# Altium PCB PCB.PcbDoc
Units mil, origin at the board's own origin, x right, y up, seen from the top; angles counter-clockwise.
Board outline 2016.73 x 1850.39 mil, 2 copper layers (Top Layer, Bottom Layer); 43 components, 26 nets, 103 pads, 47 vias.
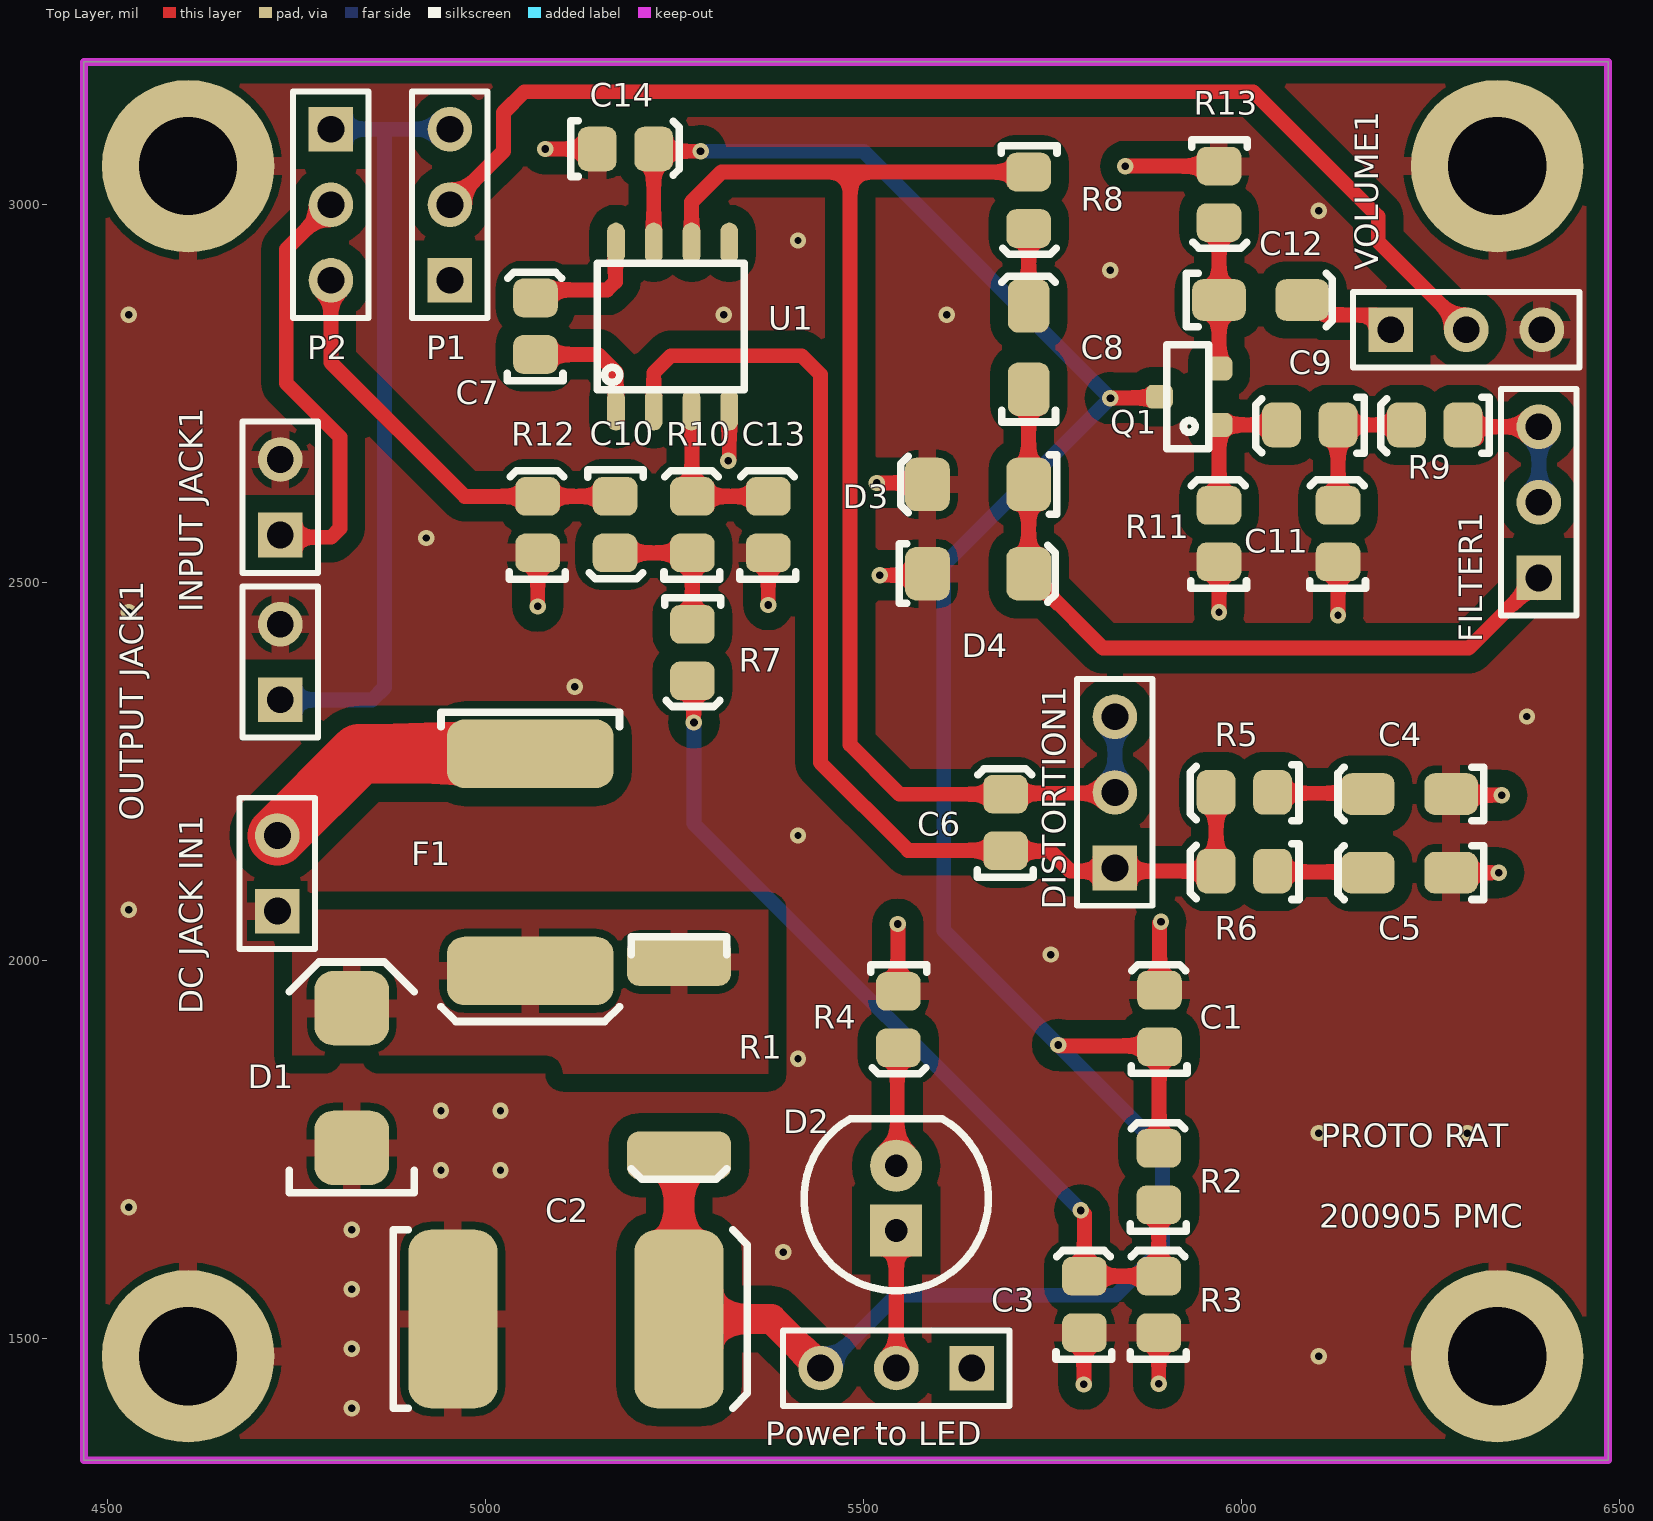
[diagram p0: Top Layer view]
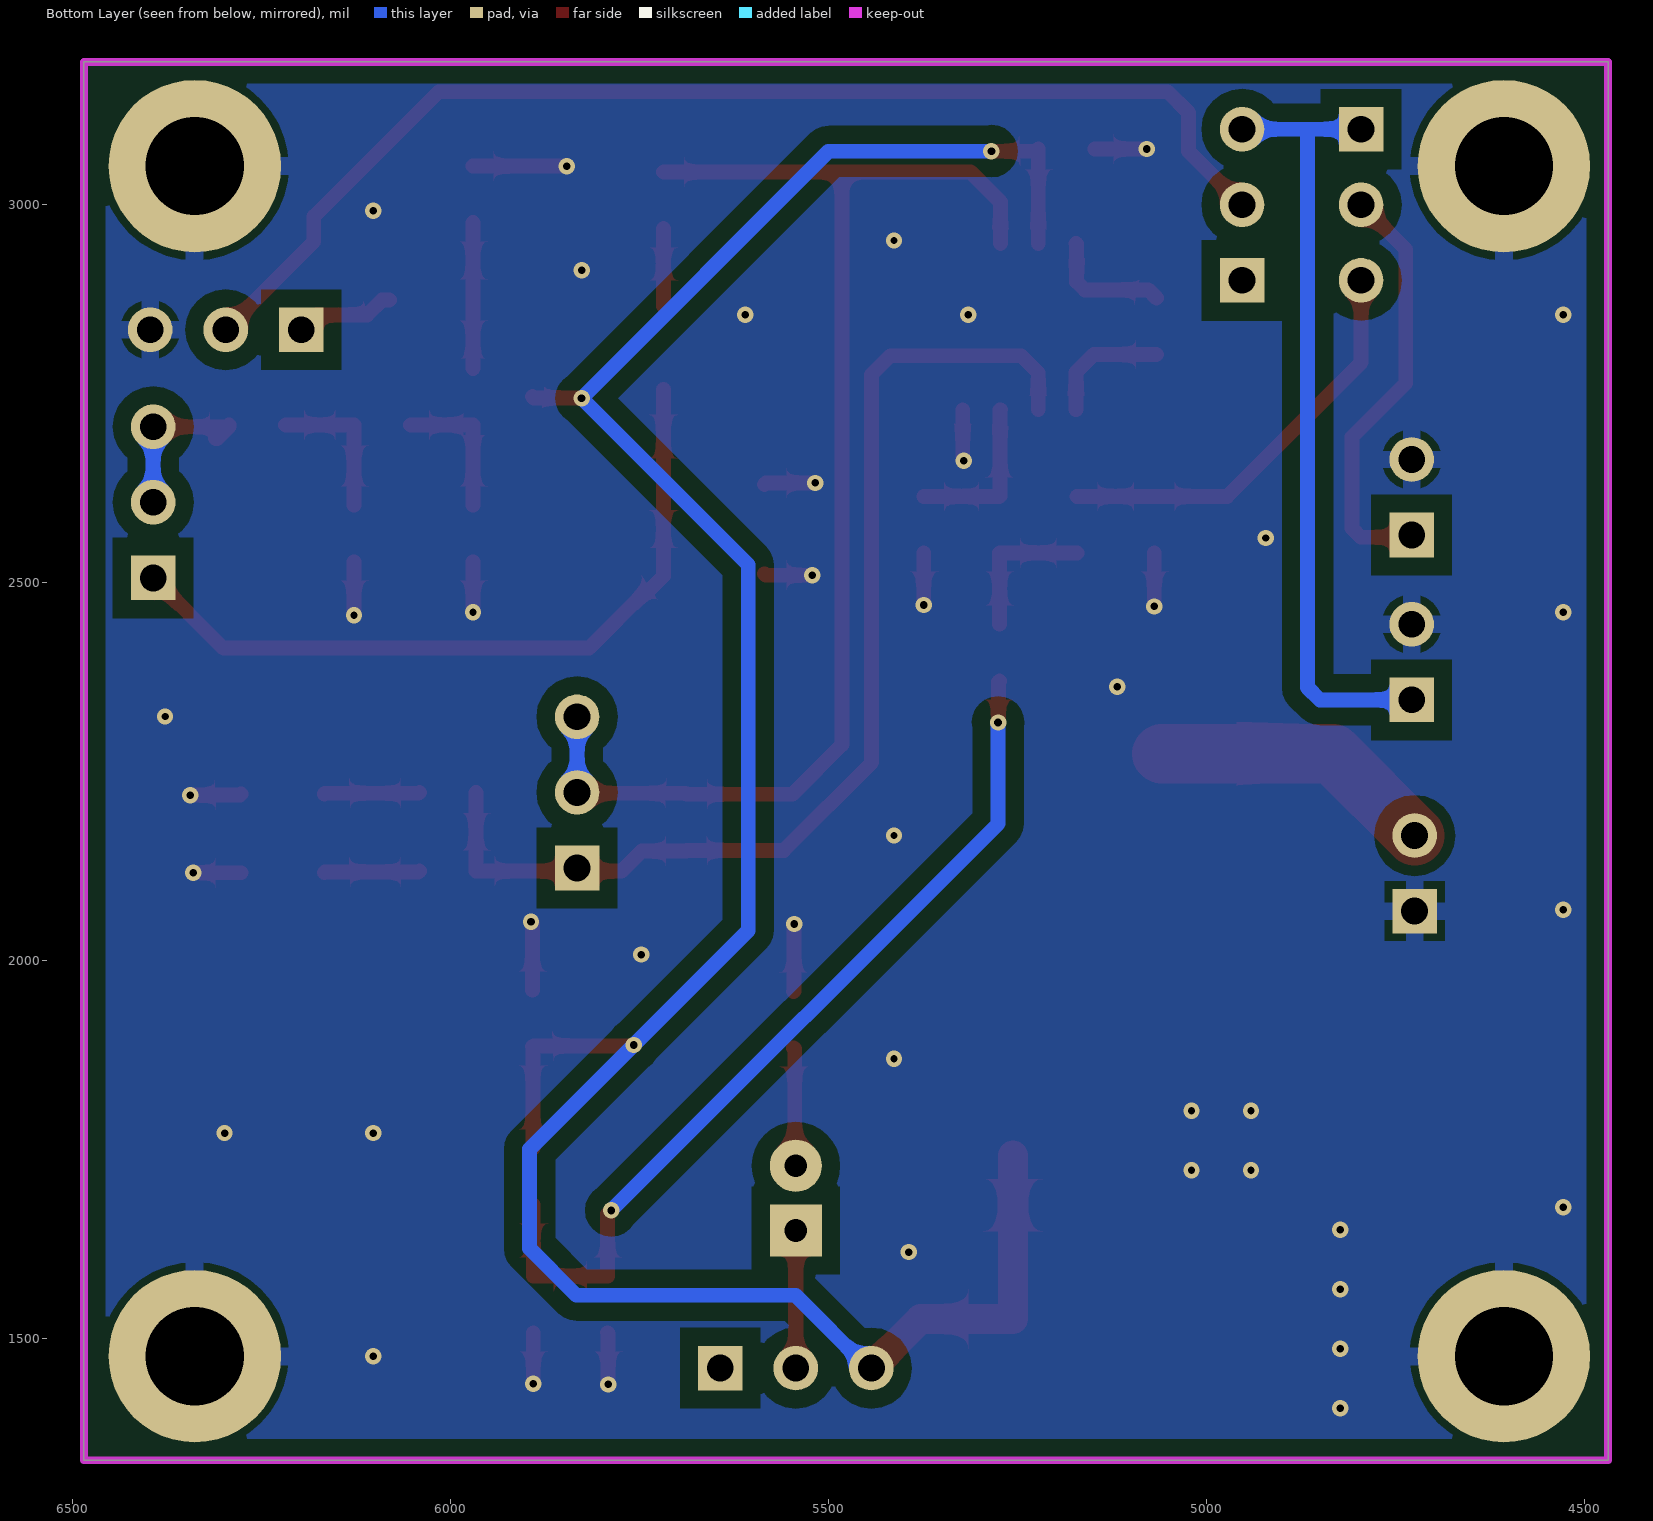
[diagram p1: Bottom Layer view, seen from below]
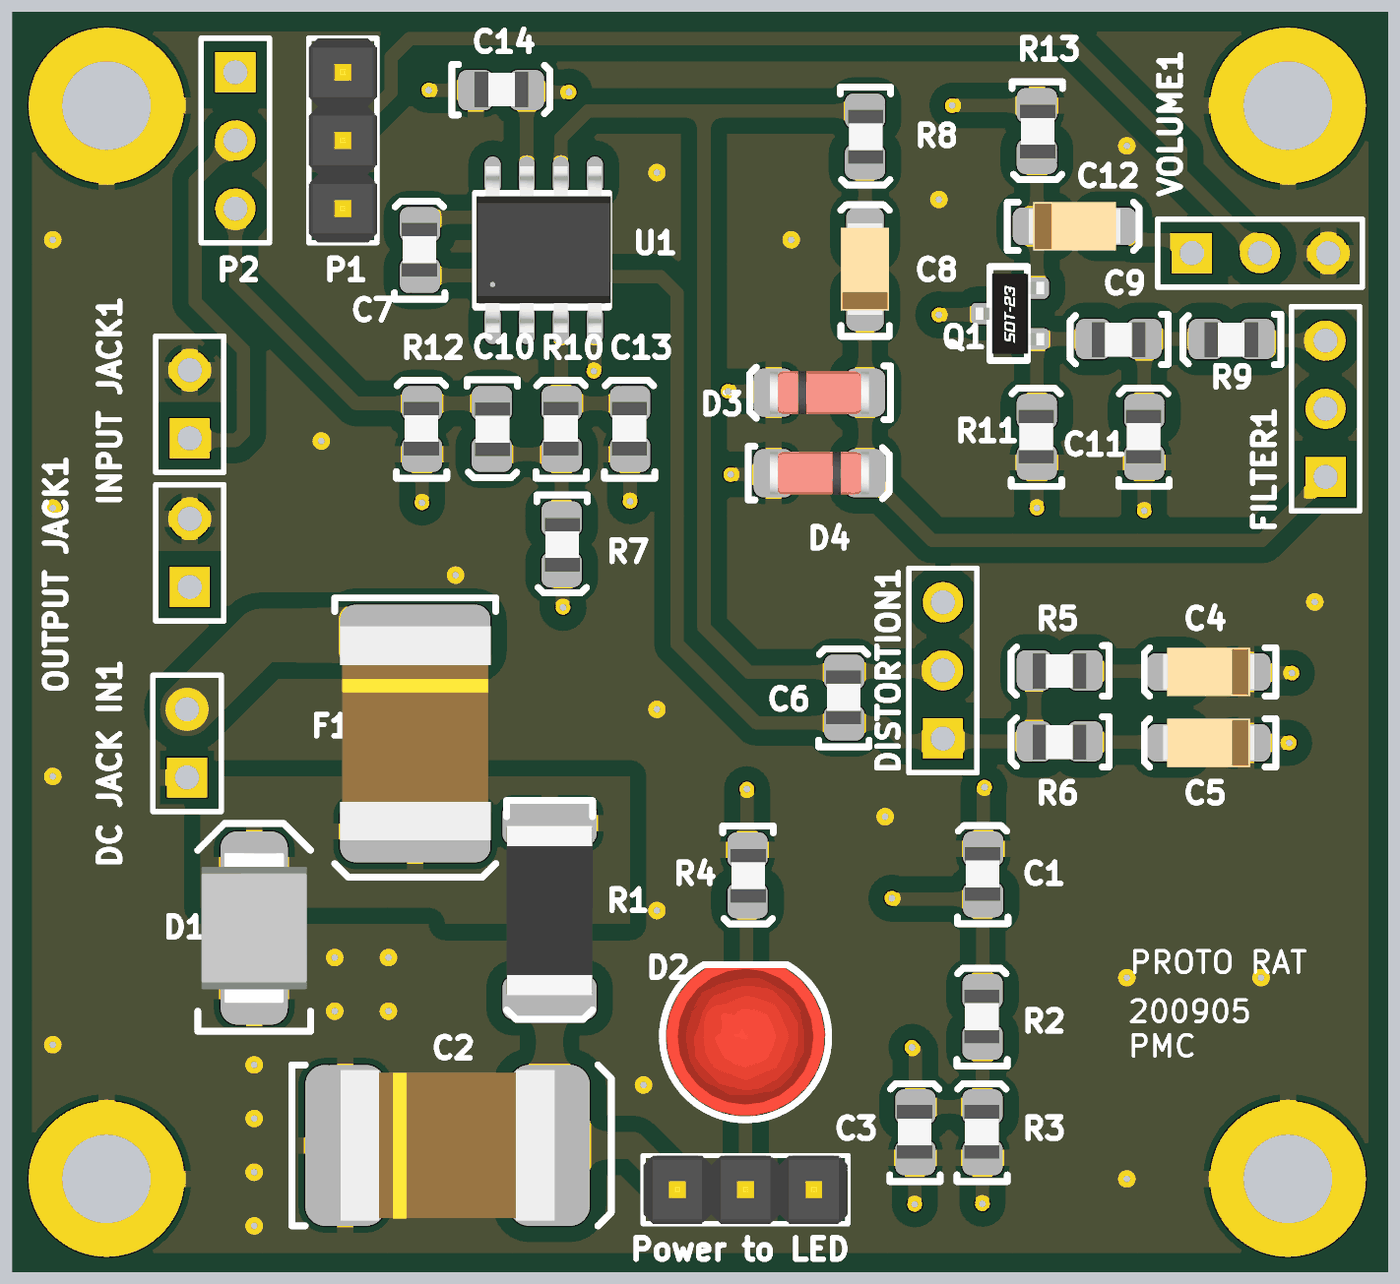
[diagram p2: 3D render of the assembled board from above, using the file's embedded part models]

## Layer stack, top to bottom
Top Solder: solder mask 0.4, Solder Resist, Dk 3.5
Top Layer: signal copper 1.4
Dielectric 1: dielectric 12.6, FR-4, Dk 4.8
Bottom Layer: signal copper 1.4
Bottom Solder: solder mask 0.4, Solder Resist, Dk 3.5

## Board outline
4468.5,1338.58 4468.5,3188.98 6485.24,3188.98 6485.24,1338.58

## Design rules (kind name [scope] priority, off if disabled: settings)
Clearance [All] p1: gap=10 ignorepadtopadclearanceinfootprint=FALSE except(0: Arc-Hole Track-Hole SMDPad-Hole THPad-Hole Via-Hole Fill-Hole Poly-Hole Region-Hole Text-Hole; 3.94: THPad-THPad; 6: Arc-SMDPad Track-SMDPad SMDPad-SMDPad; 7.87: Arc-THPad Track-THPad SMDPad-THPad THPad-Via; 8: Arc-Arc Arc-Track Arc-Region Track-Track Track-Region SMDPad-Region THPad-Region Via-Region Fill-Region Poly-Region Region-Region; 23.62: Arc-Poly Track-Poly SMDPad-Poly THPad-Poly Via-Poly Fill-Poly Poly-Poly)
Height [All] p1: minheight=0 maxheight=1968.5 prefheight=500
HoleSize [All] p1: absolutevalues=TRUE maxlimit=393.7 minlimit=1 maxpercent=80.000 minpercent=20.000
PlaneClearance [All] p1: clearance=15.75
PlaneConnect [All] p1: pad.planeconnectstyle=Relief pad.reliefexpansion=20 pad.reliefentries=4 pad.reliefconductorwidth=31.5 pad.reliefairgap=10 via.planeconnectstyle=Direct via.reliefexpansion=20 via.reliefentries=4 via.reliefconductorwidth=31.5 via.reliefairgap=10
PolygonConnect [All] p1: thpad.connectstyle=Relief thpad.reliefconductorwidth=23.62 thpad.reliefentries=4 thpad.polygonreliefangle="90 Angle" thpad.airgapwidth=10 smdpad.connectstyle=Relief smdpad.reliefconductorwidth=23.62 smdpad.reliefentries=4 smdpad.polygonreliefangle="90 Angle" smdpad.airgapwidth=10 via.connectstyle=Direct via.reliefconductorwidth=23.62 via.reliefentries=4 via.polygonreliefangle="90 Angle" via.airgapwidth=10
RoutingVias [All] p1: holewidth=28 width=50 viastyle="Through Hole" minholewidth=8 minwidth=10 maxholewidth=28 maxwidth=50
SolderMaskExpansion [All] p1: expansion=2
Width [All] p1: maxlimit=118.11 minlimit=5 preferedwidth=19.68
26 further rules are at their usual default settings.

## Classes and differential pairs
component class U_Schematic: C4 C5 C6 C7 C8 C9 C10 C11 C12 C13 C14 D3 D4 DISTORTION1 FILTER1 Q1 R5 R6 R7 R8 R9 R10 R11 R12 R13 U1 VOLUME1
component class "U_Power Supply": C1 C2 C3 D1 D2 F1 "Power to LED" R1 R2 R3 R4
component class "Top Level": "DC JACK IN1" "INPUT JACK1" "OUTPUT JACK1" P1 P2

## Components (designator, comment, footprint, x,y, rotation, side; value= is the part's Value field where it differs from the comment)
C1 "100nF" 0805 5890.7,1923.7 r90 top
C2 "68uF" 2924 5104.33,1525.59 r0 top
C3 "1µF" 0805 5791.34,1545.28 r90 top
C4 "4.7µF" 1206 6175.2,2220.27 r180 top
C5 "2.2µF" 1206 6175.2,2116.14 r180 top
C6 "100pF" 0805 5687.01,2183.07 r90 top
C7 "22pF" 0805 5064.96,2839.77 r90 top
C8 "4.7µF" 1206 5718.5,2858.27 r90 top
C9 "22nF" 0805 6090.08,2707.63 r180 top
C10 "22nF" 0805 5172.29,2576.3 r270 top
C11 "2.2nF" 0805 6126.92,2565.43 r90 top
C12 "1µF" 1206 6072.83,2874.02 r0 top
C13 "1nF" 0805 5372.98,2577.25 r90 top
C14 "10nF" 0805 5185.51,3074.85 r0 top
D1 "SD560BTR" "SMB Diode" 4822.83,1761.81 r90 top
D2 "Green" "5MM LED" 5653.54,1299.21 r90 top
D3 "FDLL4148-D87Z" "SOD-80 Diode" 5651.57,2629.92 r180 top
D4 "FDLL4148-D87Z" "SOD-80 Diode" 5651.57,2511.81 r0 top
"DC JACK IN1" "2.54mm" "TH 2.54mm Header 1x2" 4724.41,2065.35 r90 top
DISTORTION1 "Pitch" "TH 2.54mm Header 1x3" 5832.68,2122.44 r90 top
F1 "0ZCF0100AF2A" 2920 5059.06,2273.62 r270 top
FILTER1 "Pitch" "TH 2.54mm Header 1x3" 6393.7,2506.3 r90 top
"INPUT JACK1" "2.54mm" "TH 2.54mm Header 1x2" 4728.35,2562.99 r90 top
"OUTPUT JACK1" "2.54mm" "TH 2.54mm Header 1x2" 4728.35,2344.88 r90 top
P1 "2.54mm" "TH 2.54mm Header 1x3" 4952.76,2900 r90 top
P2 "2.54mm" "TH 2.54mm Header 1x3" 4795.28,3100 r270 top
"Power to LED" "2.54mm" "TH 2.54mm Header 1x3" 5643.31,1460.63 r180 top
Q1 "2SK3666" "ON SOT-23 JFET" 5931.1,2746.06 r90 top
R1 "47R" 2512 5255.91,1998.03 r270 top
R2 "100k" 0805 5889.76,1714.57 r90 top
R3 "100k" 0805 5889.76,1545.28 r90 top
R4 "1k" 0805 5547.24,1921.26 r270 top
R5 "560R" 0805 6003.46,2221.41 r180 top
R6 "47R" 0805 6003.46,2117.28 r180 top
R7 "1M" 0805 5274.65,2407.01 r270 top
R8 "1k" 0805 5719.54,3005.43 r270 top
R9 "1.5k" 0805 6255.43,2707.63 r180 top
R10 "1k" 0805 5272.59,2577.25 r90 top
R11 "1M" 0805 5969.44,2565.43 r90 top
R12 "1M" 0805 5067.87,2577.25 r90 top
R13 "10k" 0805 5971.5,3013.31 r270 top
U1 "OP-07DPSR" "TI 8-SOIC" 5272.44,3109.82 r90 top
VOLUME1 "Pitch" "TH 2.54mm Header 1x3" 6197.64,2834.65 r0 top

## Footprints (in the part's own frame and the unit in brackets; to place one, negate y for a bottom-side part, rotate by r counter-clockwise, add the part's x,y. Pads: shape width x height; smd on the part's side, far side on the other; paste and mask are expansions set on the pad)
"5MM LED" [mm]
  rect 1.75x1.75 hole 0.762: A(8.725,2.8)
  round 1.75 hole 0.762: K(10.9,2.8)
  silkscreen extent 6.7,-0.3 12.48,5.9, body extent 6.85,-0.15 12.36,5.75, height 8.9
0805 [mil]
  rrect50% 51.18x59.06 smd: 1(-37.87,-1.03) 2(36.93,-1.03)
  silkscreen extent -73,-37 71,37, body extent -39,-26 39,26, height 29
1206 [mm]
  rrect50% 1.8x1.4 smd: 1(-2.6,0) 2(0.2,0)
  silkscreen extent -3.7,-0.9 1.2,0.9, body extent -2.9,-0.9 0.5,0.9, height 1.85
2512 [mm]
  rrect50% 1.6x3.5 smd: 1(0,0) 2(6.5,0)
  silkscreen extent -0.85,-1.6 7.3,1.6, body extent 0.1,-1.6 6.4,1.6, height 0.7
2920 [mm]
  rrect50% 2.3x5.6 smd: 1(0,0) 2(7.3,0)
  silkscreen extent -1.4,-3 9,3, body extent -0.34,-2.81 7.64,2.81, height 1.14
2924 [mm]
  rrect50% 3x6 smd: 1(-3.75,0) 2(3.85,0)
  silkscreen extent -5.75,-3 6.15,3, body extent -3.94,-2.81 4.04,2.81, height 1.14
"ON SOT-23 JFET" [mm] "NUP2105L"
  rrect50% 0.8x0.9 smd: D(0,1) G(-0.95,-1) S(0.95,-1)
  silkscreen extent -1.75,-0.65 1.75,0.75, body extent -1.5,-1.27 1.5,1.28, height 1
"SMB Diode" [mm]
  rrect50% 2.5x2.5 smd: A(-0.25,0) K(4.45,0)
  silkscreen extent -1.75,-2.1 6,2.1, body extent -0.69,-1.97 4.9,1.97, height 2.5
"SOD-80 Diode" [mm]
  rrect50% 1.5x1.8 smd: A(-1.7,0) K(1.7,0)
  silkscreen extent -2.65,-1 2.6,1, body extent -1.85,-0.8 1.85,0.8, height 1.6
"TH 2.54mm Header 1x2" [mm]
  rect 1.5x1.5 hole 0.9: 1(0,0)
  round 1.5 hole 0.9: 2(2.54,0)
  silkscreen extent -1.27,-1.27 3.81,1.27
"TH 2.54mm Header 1x3" [mm]
  rect 1.5x1.5 hole 0.9: 1(0,0)
  round 1.5 hole 0.9: 2(2.54,0) 3(5.08,0)
  silkscreen extent -1.27,-1.27 6.35,1.27
"TI 8-SOIC" [mm]
  oval 1.4x0.6 smd: 1(-9.677,2.54) 2(-9.677,1.27) 3(-9.677,0) 4(-9.677,-1.27) 5(-4.089,-1.27) 6(-4.089,0) 7(-4.089,1.27) 8(-4.089,2.54)
  silkscreen extent -9,-1.78 -4.75,3.17, body extent -9.96,-1.87 -3.76,3.14, height 1.76

## Part data
C1: library part GCM21BR71H104KA37L, Digikey Part Number=490-6064-1-ND, Manufacturer=muRata, Rated Voltage=50V, Tolerance=±10%, Material=X7R, Part Number=GCM21BR71H104KA37L
C2: library part TAJV686K035RNJ, Digikey Part Number=478-13135-1-ND, Manufacturer="AVX Corporation", Rated Voltage=35V, Tolerance=10%, Material=Tantalum, Part Number=TAJV686K035RNJ
C3: library part GCM21BR71H105KA03L, Digikey Part Number=490-10675-1-ND, Manufacturer=muRata, Rated Voltage=50V, Tolerance=±10%, Material=X7R, Part Number=GCM21BR71H105KA03L
C4 C8: library part TAJA475K025RNJ, Digikey Part Number=478-11053-1-ND, Manufacturer="AVX Corporation", Rated Voltage=25V, Tolerance=±10%, Material=Tantalum, Part Number=TAJA475K025RNJ
C5: library part TAJA225K025RNJ, Digikey Part Number=478-1662-1-ND, Manufacturer="AVX Corporation", Rated Voltage=25V, Tolerance=±10%, Material=Tantalum, Part Number=TAJA225K025RNJ
C6: library part GCM2165C1H101JA16D, Digikey Part Number=490-8031-1-ND, Manufacturer=muRata, Rated Voltage=50V, Tolerance=±5%, Material="C0G, NP0", Part Number=GCM2165C1H101JA16D
C7: library part GRM21A5C2E220JW01D, Digikey Part Number=490-5534-1-ND, Manufacturer=muRata, Rated Voltage=250V, Tolerance=±5%, Material="C0G, NP0", Part Number=GRM21A5C2E220JW01D
C9 C10: library part GCM21B5C1H223JA16L, Digikey Part Number=490-5318-1-ND, Manufacturer=muRata, Rated Voltage=50V, Tolerance=±5%, Material="C0G, NP0", Part Number=GCM21B5C1H223JA16L
C11: library part GCM2165C1H222JA16D, Digikey Part Number=490-8033-1-ND, Manufacturer=muRata, Rated Voltage=50V, Tolerance=±5%, Material="C0G, NP0", Part Number=GCM2165C1H222JA16D
C12: library part TAJA105K025RNJ, Digikey Part Number=478-2363-1-ND, Manufacturer="AVX Corporation", Rated Voltage=25V, Tolerance=±10%, Material=Tantalum, Part Number=TAJA105K025RNJ
C13: library part GCM2165C1H102JA16D, Digikey Part Number=490-8032-1-ND, Manufacturer=muRata, Rated Voltage=50V, Tolerance=±5%, Material="C0G, NP0", Part Number=GCM2165C1H102JA16D
C14: library part GCM2195C1H103JA16D, Digikey Part Number=490-4783-1-ND, Manufacturer=muRata, Rated Voltage=50V, Tolerance=±5%, Material="C0G, NP0", Part Number=GCM2195C1H103JA16D
D1: "1.2V_F 600V 5A SMB", Digikey Part Number=1655-1530-2-ND, Manufacturer="SMC Diode Solutions", Digikey Link=https://www.digikey.com/product-detail/en/smc-diode-solutions/SD560BTR/1655-1530-2-ND/6022620, Part Number=SD560BTR
D2: library part C503B-GAN-CB0F0791, "LED GREEN CLEAR 5MM ROUND T/H", Digikey Part Number=C503B-GAN-CB0F0791-ND, Manufacturer="Cree Inc.", Colour=Green, Digikey Link=https://www.digikey.com/products/en?mpart=C503B-GAN-CB0F0791&v=90&fbclid=IwAR2JUDlssEKQKztQKB3h34IlXIXn-Voov26K1DpWHwQ6mgzekaFZMifRLJU, Part Number=C503B-GAN-CB0F0791
D3 D4: "DIODE GEN PURP 100V 200MA SOD80", Digikey Part Number=FDLL4148-D87ZCT-ND, Manufacturer="On Semiconductor", Digikey Link=https://www.digikey.com/product-detail/en/on-semiconductor/FDLL4148-D87Z/FDLL4148-D87ZCT-ND/3042567, Part Number=FDLL4148-D87Z
"DC JACK IN1" "INPUT JACK1" "OUTPUT JACK1": library part "TH 2.54mm Header 1x2", Angle=0, Contact=NA, Flange=No, Part Number="TH 2.54mm Header 1x2", Pitch=2.54mm, Positions=2, Row Spacing=2.54mm
DISTORTION1 FILTER1 VOLUME1: library part "TH 2.54mm Header 1x3", Part Number="A100K POT", Resistance=A100K, Positions=3
F1: "PTC RESET FUSE 60V 1A 292", Digikey Part Number=507-2070-1-ND, Manufacturer="Littelfuse Inc.", Digikey Link=https://www.digikey.com/product-detail/en/bel-fuse-inc/0ZCF0100AF2A/507-2070-1-ND/6210547, Part Number=0ZCF0100AF2A
P1 P2 "Power to LED": library part "TH 2.54mm Header 1x3", Angle=0, Contact=NA, Flange=No, Part Number="TH 2.54mm Header 1x3", Pitch=2.54mm, Positions=3, Row Spacing=2.54mm
Q1: "JFET N-Channel 10mA 200mW Surface Mount 3-CP", Digikey Part Number=869-1107-1-ND, Manufacturer="ON Semiconductor", Digikey Link=https://www.digikey.com/product-detail/en/on-semiconductor/2SK3666-3-TB-E/869-1107-1-ND/2165585, LatestRevisionDate=29-May-2009, LatestRevisionNote="IPC-7351 Footprint Added.", PackageDescription="4-Pin SOT-343 Package 1.3 mm Pitch, 2.1 mm Lead Span", PackageReference=SOT-343, PackageVersion=Sep-2000, Part Number=2SK3666, Published=24-Mar-1999, Publisher="Altium Limited"
R1: library part 352147RFT, Digikey Part Number=A116000CT-ND, Manufacturer="TE Connectivity", Rated Voltage=2W, Tolerance=0.01, Part Number=352147RFT
R2 R3: library part RC0805FR07100KL, Digikey Part Number=311-100KCRCT-ND, Manufacturer=YAGEO, Rated Voltage=0.125W, Tolerance=0.01, Material=FR-07, Part Number=RC0805FR07100KL
R4 R8 R10: library part RC0805FR071KL, Digikey Part Number=311-1.00KCRCT-ND, Manufacturer=YAGEO, Rated Voltage=0.125W, Tolerance=0.01, Material=FR-07, Part Number=RC0805FR071KL
R5: library part RC0805FR07560RL, Digikey Part Number=311-560CRCT-ND, Manufacturer=YAGEO, Rated Voltage=0.125W, Tolerance=0.01, Material=FR-07, Part Number=RC0805FR07560RL
R6: library part RC0805FR0747RL, Digikey Part Number=311-47.0CRCT-ND, Manufacturer=YAGEO, Rated Voltage=0.125W, Tolerance=0.01, Material=FR-07, Part Number=RC0805FR0747RL
R7 R11 R12: library part RC0805FR071ML, Digikey Part Number=311-1.00MCRCT-ND, Manufacturer=YAGEO, Rated Voltage=0.125W, Tolerance=0.01, Material=FR-07, Part Number=RC0805FR071ML
R9: library part RC0805FR071K5L, Digikey Part Number=311-1.50KCRCT-ND, Manufacturer=YAGEO, Rated Voltage=0.125W, Tolerance=0.01, Material=FR-07, Part Number=RC0805FR071K5L
R13: library part RC0805FR0710KL, Digikey Part Number=311-10.0KCRCT-ND, Manufacturer=YAGEO, Rated Voltage=0.125W, Tolerance=0.01, Material=FR-07, Part Number=RC0805FR0710KL
U1: "General Purpose Amplifier 1 Circuit 8-SO", Digikey Part Number=296-14171-2-ND, Manufacturer="Texas Instruments", Digikey Link=https://www.digikey.com/product-detail/en/texas-instruments/OP-07DPSR/296-14171-2-ND/525998, Part Number=OP-07DPSR

## Free pads (board coordinates)
  round 228.35 hole 129.92: 0(4606.3,1476.38) 0(4606.3,3051.18) 0(6338.58,1476.38) 0(6338.58,3051.18)

## Via types
v1: diameter 21.65, hole 9.84, Top Layer to Bottom Layer, 38 vias
v2: diameter 21.65, hole 10.24, Top Layer to Bottom Layer, 9 vias

## Nets (pads, with @x,y where several pads share a name; then routed paths per layer and width w, separated by ;. In a path a pad name is that pad's centre, name@x,y a point inside that pad or via, vN(x,y) a via of type N, cw(c..) or ccw(c..) an arc to the next point about the centre after c; other vN are vias at no path point)
0V: "DC JACK IN1.1" "INPUT JACK1.2" "OUTPUT JACK1.2" C1.2 C2.1 C3.1 C4.1 C5.1 C11.1 C13.1 C14.1 D1.A D3.K D4.A pad.0 R3.1 R4.1 R11.1 R12.1 R13.1 U1.4 VOLUME1.3 | length 1118.2
  Top Layer w19.68: v1(5068.9,2468.5) R12.1 ; v2(5078.74,3073.82) C14.1 ; v1(5320.87,2661.42) 5320.87,2661.95 5322.44,2663.52 U1.4 ; v2(5374.02,2470.47) C13.1 ; v1(5517.72,2631.89) 5582.68,2631.89 D3.K ; v1(5521.65,2509.84) 5582.68,2509.84 D4.A ; v2(5545.28,2048.23) 5545.65,2047.85 5545.65,1959.69 R4.1 ; v1(5791.34,1438.98) 5791.72,1439.35 5791.72,1506.75 C3.1 ; v1(5846.46,3051.18) R13.1 ; v1(5890.56,1439.77) 5890.68,1439.89 5890.68,1507.29 R3.1 ; C1.2 5891.73,2049.21 v2(5893.7,2051.18) ; v1(5970.47,2460.63) R11.1 ; v1(6127.95,2456.69) C11.1 ; C5.1 v1(6340.55,2116.14) ; C4.1 6278.95,2218.88 6344.11,2218.88 v1(6344.49,2218.5)
  other v1: 4822.83,1407.48 6102.36,1476.38 4822.83,1486.22 4822.83,1564.96 5393.7,1614.17 4822.83,1643.7 4527.56,1673.23 4940.94,1722.44 5019.69,1722.44 6102.36,1771.65 6299.21,1771.65 4940.94,1801.18 5019.69,1801.18 5413.39,1870.08 5748.03,2007.87 4527.56,2066.93 5413.39,2165.35 6377.95,2322.83 5118.11,2362.2 4527.56,2460.63 4921.26,2559.06 4527.56,2854.33 5314.96,2854.33 5610.24,2854.33 5826.77,2913.39 5413.39,2952.76 6102.36,2992.13
4.5V: C3.2 R2.1 R3.2 R7.2 | length 1195.7
  Top Layer w19.68: R7.2 5275.21,2368.49 5275.21,2315.34 v2(5275.59,2314.96) ; v2(5787.4,1669.29) 5792.37,1664.32 C3.2 R3.2 R2.1
  Bottom Layer w19.68: v2(5275.59,2314.96) 5275.59,2181.1 v2(5787.4,1669.29)
9V: "Power to LED.3" C1.1 C2.2 C14.2 Q1.D R1.2 R2.2 U1.7 | length 3482.3
  Top Layer w19.68: U1.7 C14.2 5225.39,3070.87 v2(5284.45,3070.87) ; v2(5757.87,1888.19) 5759.06,1887.01 5890.55,1887.01 C1.1 5891.26,1885.36 5891.26,1751.96 R2.2 ; v2(5826.76,2744.09) 5827.14,2744.47 5890.13,2744.47 Q1.D
  Top Layer w39.37: R1.2 C2.2 5378.35,1525.59 5443.31,1460.63
  Bottom Layer w19.68: v2(5284.45,3070.87) 5499.98,3070.87 v2(5826.76,2744.09) 5606.3,2523.63 5606.3,2039.76 v2(5757.87,1888.19) 5895.67,1750.39 5895.67,1619.09 5833.66,1557.09 5543.7,1557.09 5447.24,1460.63
Bypass: "OUTPUT JACK1.1" P1.3 P2.1 | length 1041.2
  Bottom Layer w19.68: 4728.35,2344.88 4849.8,2344.88 4866.14,2361.22 4866.14,3099.02 4865.16,3100 ; P2.1 4865.16,3100 ; P1.3 4865.16,3100
"From Output": P1.2 VOLUME1.2 | length 1586.7
  Top Layer w19.68: P1.2 5023.62,3070.87 5023.62,3122.05 5051.18,3149.61 6015.75,3149.61 6181.1,2984.25 6181.1,2951.18 VOLUME1.2
NetC4_2: C4.2 R5.1 | length 126.9
  Top Layer w19.68: R5.1 6042.42,2221.36 6166.24,2221.36 C4.2
NetC5_2: C5.2 R6.1 | length 126.9
  Top Layer w19.68: R6.1 6042.42,2117.23 6166.24,2117.23 C5.2
NetC6_1: C6.1 DISTORTION1.1 R5.2 R6.2 U1.2 | length 1489.7
  Top Layer w19.68: U1.2 5222.44,2777.56 5245.08,2800.2 5418.31,2800.2 5442.91,2775.59 5442.91,2261.81 5559.06,2145.67 5687.57,2145.67 C6.1 5688.4,2144.84 5747.1,2144.84 5773.62,2118.31 R6.2 R5.2
NetC6_2: C6.2 DISTORTION1.2 DISTORTION1.3 R8.1 U1.6 | length 1752
  Top Layer w19.68: U1.6 5272.44,3003.67 5312.07,3043.3 5482.28,3043.3 ; C6.2 5547.72,2220 5482.28,2285.43 5482.28,3043.3 ; C6.2@5689.26,2221.22 5831.46,2221.22 DISTORTION1.2 ; R8.1 5482.28,3043.3
  Bottom Layer w19.68: DISTORTION1.2 DISTORTION1.3
NetC7_1: C7.1 U1.1 | length 165.7
  Top Layer w19.68: C7.1 5148.89,2801.9 5172.44,2778.35 U1.1
NetC7_2: C7.2 U1.8 | length 165.6
  Top Layer w19.68: C7.2 5076.68,2887.38 5161,2887.38 5171.69,2898.07 5171.69,2948.07 U1.8
NetC8_1: C8.1 D3.A D4.K FILTER1.1 | length 1000.4
  Top Layer w19.68: C8.1 D3.A D4.K 5718.5,2508.57 5737.81,2489.26 5741.06,2489.26 5816.93,2413.39 6300.79,2413.39 FILTER1.1
NetC8_2: C8.2 R8.2 | length 102.4
  Top Layer w19.68: C8.2 R8.2
NetC9_1: C9.1 C11.2 R9.2 | length 196.9
  Top Layer w19.68: C11.2 C9.1 R9.2
NetC9_2: C9.2 Q1.G R11.2 | length 189
  Top Layer w19.68: R11.2 Q1.G C9.2
NetC10_2: C10.2 R7.1 R10.1 | length 196.9
  Top Layer w19.68: C10.2 R10.1 R7.1
NetC12_1: C12.1 Q1.S R13.2 | length 192.9
  Top Layer w19.68: Q1.S C12.1 R13.2
NetC12_2: C12.2 VOLUME1.1 | length 133.2
  Top Layer w19.68: C12.2 6090.71,2874.02 6110.4,2854.33 6177.95,2854.33 VOLUME1.1
NetC13_2: C13.2 R10.2 U1.3 | length 215.5
  Top Layer w19.68: U1.3 5273.03,2728.23 5273.03,2614.76 R10.2 C13.2
NetD1_K: D1.K F1.2 R1.1
NetD2_A: "Power to LED.2" D2.A | length 182.1
  Top Layer w20: 5543.31,1460.63 D2.A
NetD2_K: D2.K R4.2 | length 157.2
  Top Layer w19.68: D2.K 5544.76,1729.8 5544.76,1882.88 R4.2
NetFILTER1_2: FILTER1.2 FILTER1.3 R9.1 | length 228
  Top Layer w19.68: R9.1@6311.17,2690.8 6308.83,2690.8 6293.3,2706.32 R9.1 6295.67,2706.3 FILTER1.3
  Bottom Layer w19.68: FILTER1.2 FILTER1.3
"NetINPUT JACK1_1": "INPUT JACK1.1" P2.2 | length 567
  Top Layer w19.68: 4728.35,2562.99 4731.3,2560.04 4795.56,2560.04 4807.09,2571.57 4807.09,2692.91 4736.22,2763.78 4736.22,2940.94 P2.2
"Power In": "DC JACK IN1.2" F1.1 | length 379.5
  Top Layer w78.74: 4724.41,2165.35 4832.68,2273.62 F1.1
"To Input": C10.1 P2.3 R12.2 | length 558
  Top Layer w19.68: P2.3 4795.28,2791.34 4972.44,2614.17 R12.2 C10.1
pads on no net: "Power to LED.1" P1.1 U1.5

## Polygon pours and split planes (outlines as drawn)
0V on Top Layer "Top Layer-0V 1" (solid, remove dead copper, pour order 14): 4468.5,3188.98 6485.24,3188.98 6485.24,1338.58 4468.5,1338.58
NetD1_K on Top Layer (solid, remove dead copper, pour order 10): 4744.09,2066.93 5374.02,2066.93 5374.02,1850.39 4744.09,1850.39
no net on Top Layer (solid, pour order 8): 4724.41,1850.39
0V on Top Layer (solid, pour order 6): 4724.41,1850.39 5078.74,1850.39 5078.74,1338.58 4724.41,1338.58
0V on Bottom Layer "Bottom Layer-0V" (solid, remove dead copper, pour order 4): 4468.5,3188.98 6485.24,3188.98 6485.24,1338.58 4468.5,1338.58

## Keep-outs
Keep-Out Layer:
  the board outline again, w10

## Silkscreen, mask and mechanical layers (free items; w line width, h text height)
Top Overlay:
  text "PROTO RAT" at 6105.31,1752.95 h31.5
  text "200905 PMC" at 6103.35,1646.65 h31.5

## Dimensions
4468.5,3188.98 to 4468.5,1338.58 on Drill Drawing
4468.5,3188.98 to 6485.24,3188.98 on Drill Drawing